# Altium PCB Led Strip 2 colors.PcbDoc
Units mm, origin at the board's own origin, x right, y up, seen from the top; angles counter-clockwise.
Board outline 230 x 10 mm, 4 copper layers (Top Layer, Internal Plane 1, Internal Plane 2, Bottom Layer), stack 0.462 mm thick; 28 components, 17 nets, 70 pads, 15 vias.
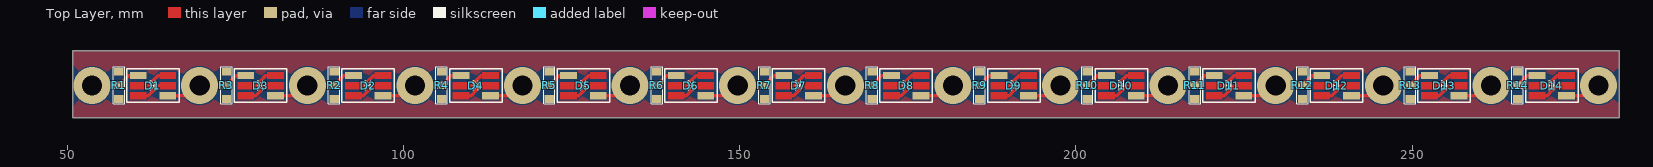
[diagram p0: Top Layer view]
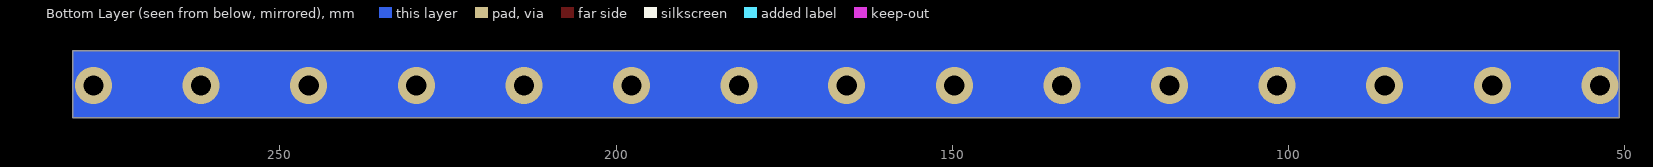
[diagram p1: Bottom Layer view, seen from below]
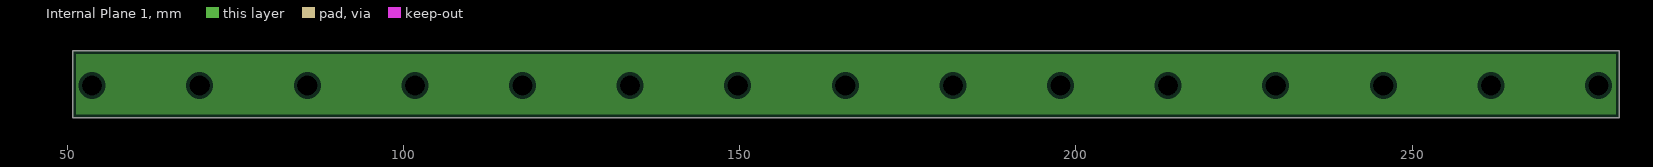
[diagram p2: Internal Plane 1, clearances drawn from the general rule]
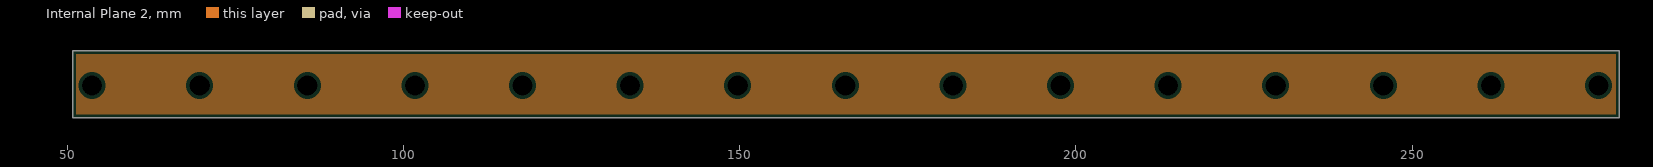
[diagram p3: Internal Plane 2, clearances drawn from the general rule]

## Layer stack, top to bottom
Top Solder: solder mask 0.0102, Solder Resist, Dk 3.5
Top Layer: signal copper 0.0356
Internal Plane 1: plane copper 0.0356
Internal Plane 2: plane copper 0.0356
Dielectric 1: dielectric 0.32, FR-4, Dk 4.8
Bottom Layer: signal copper 0.0356
Bottom Solder: solder mask 0.0102, Solder Resist, Dk 3.5

## Board outline
50.8,76.2 280.8,76.2 280.8,86.2 50.8,86.2

## Design rules (kind name [scope] priority, off if disabled: settings)
Clearance [All] p1: gap=0.2
PlaneClearance [All] p1: clearance=0.508
PlaneConnect [All] p1: planeconnectstyle=Relief reliefexpansion=0.508 reliefentries=4 reliefconductorwidth=0.3 reliefairgap=0.5
PolygonConnect [All] p1: connectstyle=Relief reliefconductorwidth=0.3 reliefentries=4 polygonreliefangle="90 Angle" airgapwidth=0.5
RoutingVias [All] p1: holewidth=0.4 width=3 viastyle="Through Hole" minholewidth=0.711 minwidth=1.27 maxholewidth=0.711 maxwidth=1.27
SolderMaskExpansion [All] p1: expansion=0.05
Width [All] p1: maxlimit=2 minlimit=0.2 preferedwidth=1
27 further rules are at their usual default settings.

## Components (designator, comment, footprint, x,y, rotation, side; value= is the part's Value field where it differs from the comment)
D1 "Cold White" "LED SMD 5050 White compact R" 60.55,82.5 r0 top
D2 "Cold White" "LED SMD 5050 White compact R" 92.55,82.5 r0 top
D3 "Cold White" "LED SMD 5050 White compact R" 76.55,82.5 r0 top
D4 "Cold White" "LED SMD 5050 White compact R" 108.55,82.5 r0 top
D5 "Cold White" "LED SMD 5050 White compact R" 124.55,82.5 r0 top
D6 "Cold White" "LED SMD 5050 White compact R" 140.55,82.5 r0 top
D7 "Cold White" "LED SMD 5050 White compact R" 156.55,82.5 r0 top
D8 "Cold White" "LED SMD 5050 White compact R" 172.55,82.5 r0 top
D9 "Cold White" "LED SMD 5050 White compact R" 188.55,82.5 r0 top
D10 "Cold White" "LED SMD 5050 White compact R" 204.55,82.5 r0 top
D11 "Cold White" "LED SMD 5050 White compact R" 220.55,82.5 r0 top
D12 "Cold White" "LED SMD 5050 White compact R" 236.55,82.5 r0 top
D13 "Cold White" "LED SMD 5050 White compact R" 252.55,82.5 r0 top
D14 "Cold White" "LED SMD 5050 White compact R" 268.55,82.5 r0 top
R1 "1: Om; 2: Om" "SMD 0805 (2012) Double" 57.7,79 r90 top
R2 "1: Om; 2: Om" "SMD 0805 (2012) Double" 89.7,79 r90 top
R3 "1: Om; 2: Om" "SMD 0805 (2012) Double" 73.7,79 r90 top
R4 "1: Om; 2: Om" "SMD 0805 (2012) Double" 105.7,79 r90 top
R5 "1: Om; 2: Om" "SMD 0805 (2012) Double" 121.7,79 r90 top
R6 "1: Om; 2: Om" "SMD 0805 (2012) Double" 137.7,79 r90 top
R7 "1: Om; 2: Om" "SMD 0805 (2012) Double" 153.7,79 r90 top
R8 "1: Om; 2: Om" "SMD 0805 (2012) Double" 169.7,79 r90 top
R9 "1: Om; 2: Om" "SMD 0805 (2012) Double" 185.7,79 r90 top
R10 "1: Om; 2: Om" "SMD 0805 (2012) Double" 201.7,79 r90 top
R11 "1: Om; 2: Om" "SMD 0805 (2012) Double" 217.7,79 r90 top
R12 "1: Om; 2: Om" "SMD 0805 (2012) Double" 233.7,79 r90 top
R13 "1: Om; 2: Om" "SMD 0805 (2012) Double" 249.7,79 r90 top
R14 "1: Om; 2: Om" "SMD 0805 (2012) Double" 265.7,79 r90 top

## Footprints (in the part's own frame and the unit in brackets; to place one, negate y for a bottom-side part, rotate by r counter-clockwise, add the part's x,y. Pads: shape width x height; smd on the part's side, far side on the other; paste and mask are expansions set on the pad)
"LED SMD 5050 White compact R" [mm]
  rect 2.5x1.1 smd: A(0,0) K(4.4,-3)
  Top Layer region: -1.25,-3.55 1.25,-3.55 1.25,-2.45 -1.25,-2.45
  Top Layer region: -1.25,-2.05 1.25,-2.05 1.25,-0.95 -1.25,-0.95
  Top Layer region: 3.15,-2.05 5.65,-2.05 5.65,-0.95 3.15,-0.95
  Top Layer region: 3.15,-0.55 5.65,-0.55 5.65,0.55 3.15,0.55
  Top Layer lines w0.5: 0,-3 1.5,-3 2.3,-2.2 3,-1.5 4.4,-1.5 ; 0,-1.5 1.5,-1.5 2.2,-0.8 3,0 4.4,0
  silkscreen extent -1.7,-4 6.1,1, body extent -0.45,-4 4.85,1, height 1.6
"SMD 0805 (2012) Double" [mil]
  rect 45x55 smd: 1(0.35,0.98) 2(160.35,0.98) 3(80.35,0.98)
  silkscreen extent -29,-32 189,34, body extent 1,-24 159,26, height 18

## Part data
D1 D2 D3 D4 D5 D6 D7 D8 D9 D10 D11 D12 D13 D14: library part "Led SMD White Cold", "?3v ?20mA"
R1 R2 R3 R4 R5 R6 R7 R8 R9 R10 R11 R12 R13 R14: library part "Res SMD (Select one way)", "Choice from two resistors"

## Via types
v1: diameter 5.5, hole 3, Top Layer to Bottom Layer, 15 vias

## Nets (pads, with @x,y where several pads share a name; then routed paths per layer and width w, separated by ;. In a path a pad name is that pad's centre, name@x,y a point inside that pad or via, vN(x,y) a via of type N, cw(c..) or ccw(c..) an arc to the next point about the centre after c; other vN are vias at no path point)
GND: D1.K D2.K D3.K D4.K D5.K D6.K D7.K D8.K D9.K D10.K D11.K D12.K D13.K D14.K | length 45.5
  Top Layer w0.5: D1.K v1@68.2,79.5 ; D3.K v1@84.2,79.5 ; D2.K v1@100.2,79.5 ; D4.K v1@116.2,79.5 ; D5.K v1@132.2,79.5 ; D6.K v1@148.2,79.5 ; D7.K v1@164.2,79.5 ; D8.K v1@180.2,79.5 ; D9.K v1@196.2,79.5 ; D10.K v1@212.2,79.5 ; D11.K v1@228.2,79.5 ; D12.K v1@244.2,79.5 ; D13.K v1@260.2,79.5 ; D14.K v1@276.2,79.5
  other v1: 53.7,81 69.7,81 85.7,81 101.7,81 117.7,81 133.7,81 149.7,81 165.7,81 181.7,81 197.7,81 213.7,81 229.7,81 245.7,81 261.7,81 277.7,81
NetD1_A: D1.A R1.3 | length 3.5
  Top Layer w0.5: R1.3 59.134,82.5 D1.A
NetD2_A: D2.A R2.3 | length 3.5
  Top Layer w0.5: R2.3 91.134,82.5 D2.A
NetD3_A: D3.A R3.3 | length 3.5
  Top Layer w0.5: R3.3 75.134,82.5 D3.A
NetD4_A: D4.A R4.3 | length 3.5
  Top Layer w0.5: R4.3 107.134,82.5 D4.A
NetD5_A: D5.A R5.3 | length 3.5
  Top Layer w0.5: R5.3 123.134,82.5 D5.A
NetD6_A: D6.A R6.3 | length 3.5
  Top Layer w0.5: R6.3 139.134,82.5 D6.A
NetD7_A: D7.A R7.3 | length 3.5
  Top Layer w0.5: R7.3 155.134,82.5 D7.A
NetD8_A: D8.A R8.3 | length 3.5
  Top Layer w0.5: R8.3 171.134,82.5 D8.A
NetD9_A: D9.A R9.3 | length 3.5
  Top Layer w0.5: R9.3 187.134,82.5 D9.A
NetD10_A: D10.A R10.3 | length 3.5
  Top Layer w0.5: R10.3 203.134,82.5 D10.A
NetD11_A: D11.A R11.3 | length 3.5
  Top Layer w0.5: R11.3 219.134,82.5 D11.A
NetD12_A: D12.A R12.3 | length 3.5
  Top Layer w0.5: R12.3 235.134,82.5 D12.A
NetD13_A: D13.A R13.3 | length 3.5
  Top Layer w0.5: R13.3 251.134,82.5 D13.A
NetD14_A: D14.A R14.3 | length 3.5
  Top Layer w0.5: R14.3 267.134,82.5 D14.A
VCC1: R1.2 R2.2 R3.2 R4.2 R5.2 R6.2 R7.2 R8.2 R9.2 R10.2 R11.2 R12.2 R13.2 R14.2
VCC2: R1.1 R2.1 R3.1 R4.1 R5.1 R6.1 R7.1 R8.1 R9.1 R10.1 R11.1 R12.1 R13.1 R14.1

## Polygon pours and split planes (outlines as drawn)
VCC1 on Top Layer "Top Layer-No Net" (solid, pour order 12): 280.8,81.2 280.8,86.2 50.8,86.2 50.8,81.2
VCC2 on Top Layer "Top Layer-No Net" (solid, pour order 12): 280.8,76.2 280.8,81.2 50.8,81.2 50.8,76.2

## Other copper
Bottom Layer:
  rectangle net GND: 50.8,76.2 280.8,86.2